# Altium PCB STM32F302VC_EVM.PcbDoc (part 6 of 19)
Units mil, origin at the board's own origin, x right, y up, seen from the top; angles counter-clockwise.
Board outline 3937.01 x 3937.01 mil, 2 copper layers (Top Layer, Bottom Layer); 117 components, 166 nets, 602 pads, 373 vias.
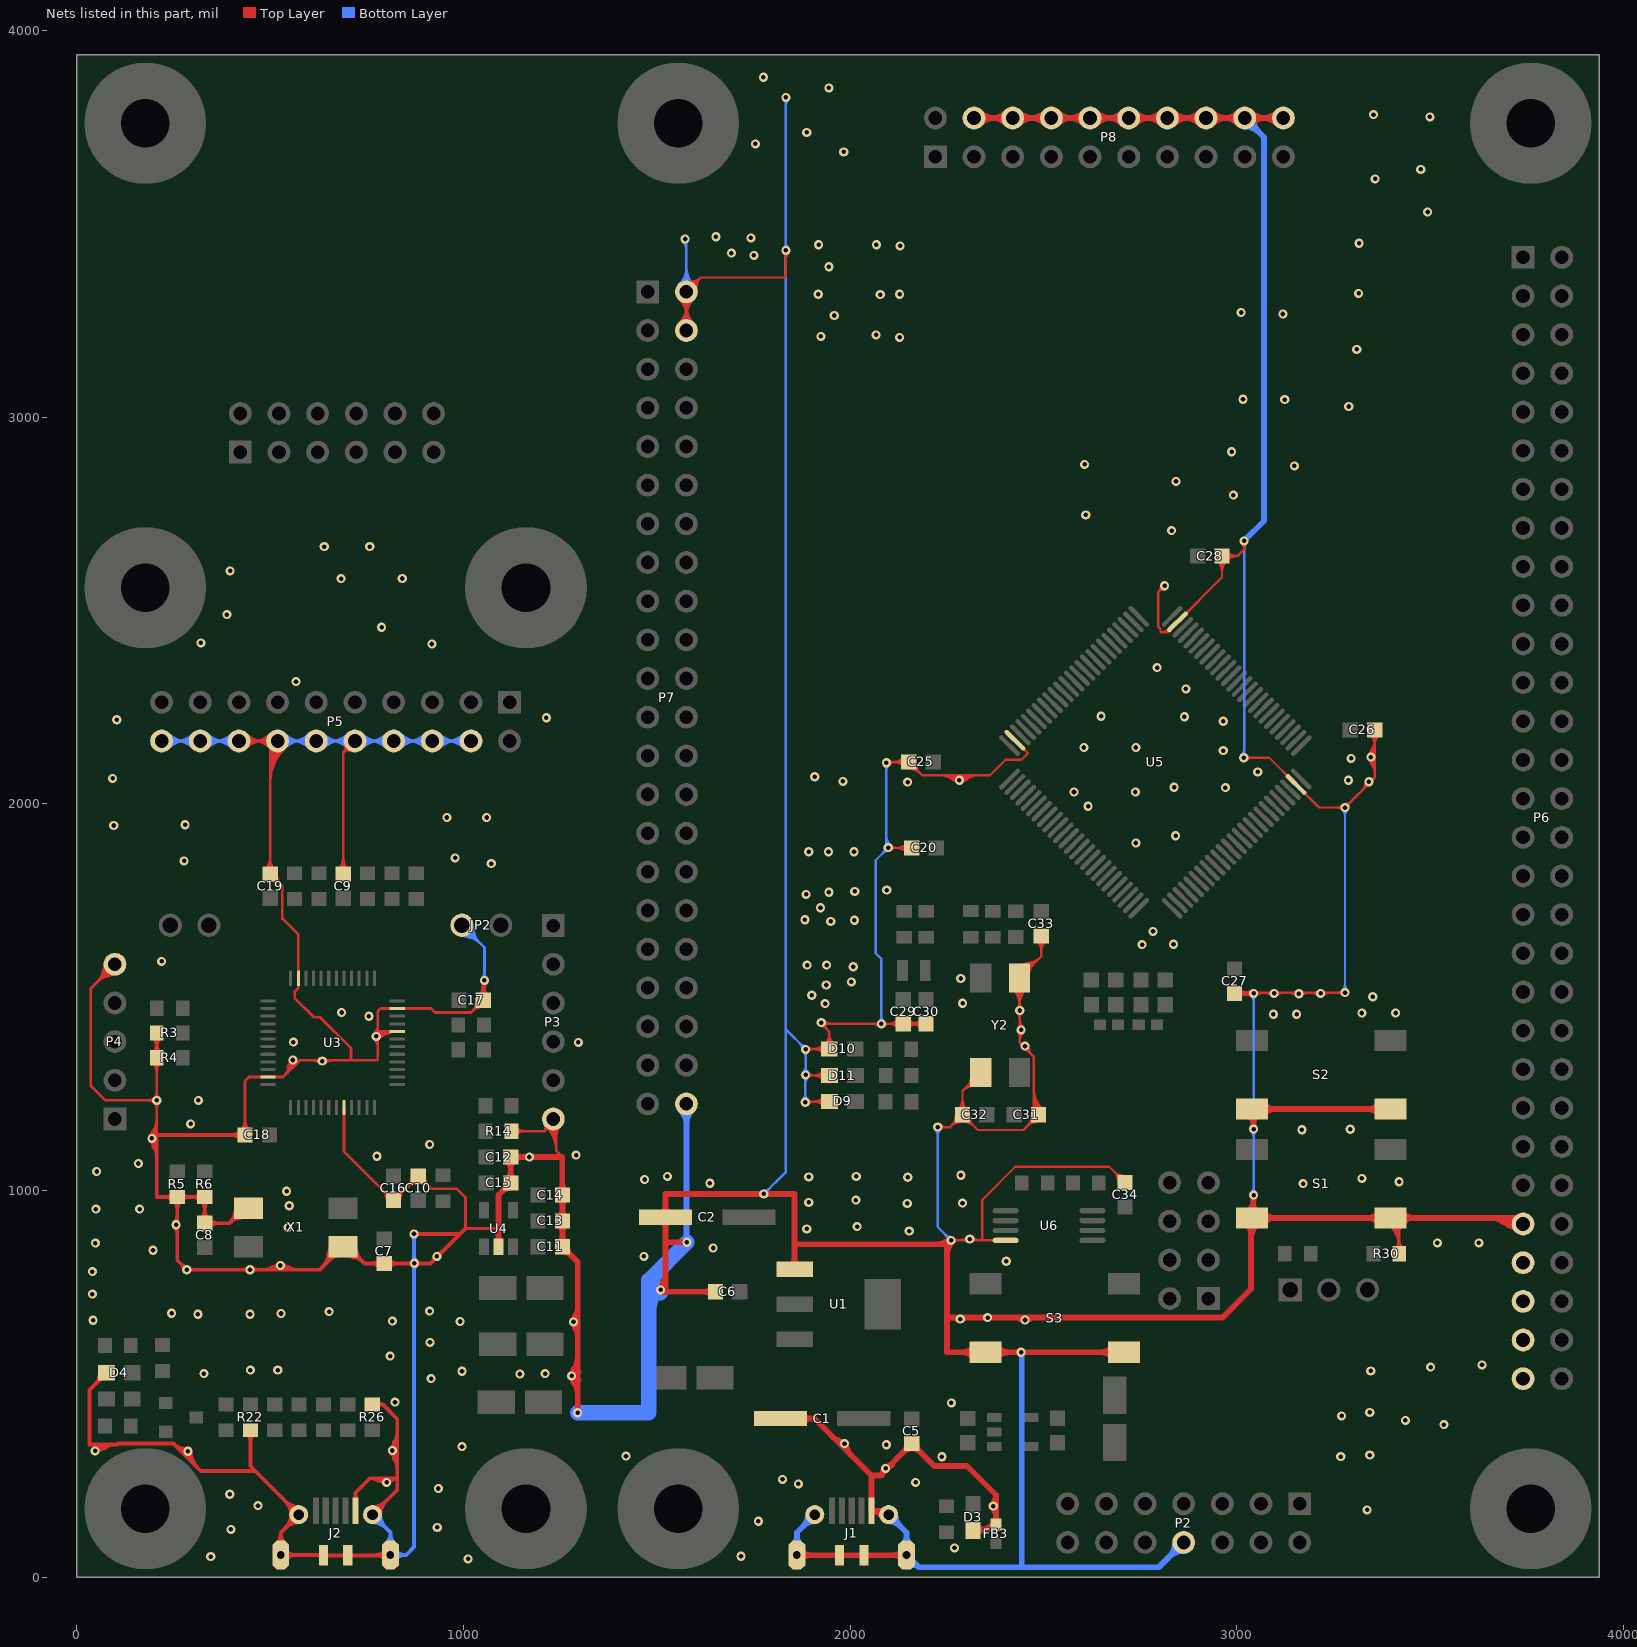
[diagram p6: the nets of this part, all layers, seen from the top]

## Via types
v1: diameter 23.62, hole 11.81, Top Layer to Bottom Layer, tented both sides, 372 vias
v2: diameter 50, hole 28, Top Layer to Bottom Layer, tented both sides, 1 vias

## Nets (pads, with @x,y where several pads share a name; then routed paths per layer and width w, separated by ;. In a path a pad name is that pad's centre, name@x,y a point inside that pad or via, vN(x,y) a via of type N, cw(c..) or ccw(c..) an arc to the next point about the centre after c; other vN are vias at no path point) (continued)
GND: (continued)
  Top Layer w10: v1@48.24,333.5 ccw(c50.43,347.44) 62.65,340.38 ; v1@53.25,323.67 cw(c69.09,315.56) 69.09,333.35 ; D4.2@76.71,528.54 32.48,484.31 32.48,343.5 105.24,343.5 107.38,345.65 249.83,345.65 ; v1@190.49,1129.01 cw(c181.54,1114.2) 198.78,1112.78 ; R3.2@206.69,1407.48 206.69,1345.47 R4.1@208.66,1343.5 ; v1@293.88,323.7 ccw(c310.82,318.23) 298.24,305.65 ; C18.1@435.04,1143.7 208.66,1143.7 ; X1.4@443.9,954.53 433.49,954.53 394.32,915.35 C8.2@330.71,915.35 R6.1@330.71,983.27 R5.1@259.84,983.27 ; R22.1@448.82,379.92 448.82,286.91 J2.9@573.82,161.91 527.56,115.65 J2.7@527.56,57.58 636.81,57.58 J2.11@637.8,56.59 J2.10@700.79,56.59 810.04,56.59 J2.6@811.02,57.58 ; 460.38,274.85 320.62,274.85 249.83,345.65 ; J2.5@720.47,171.75 720.47,218.5 757.87,255.91 828.61,255.91 ; R26.2@763.78,446.85 791.34,446.85 ; J2.8@764.76,161.91 828.61,225.76 828.61,255.91 ; v1@812.48,321.89 cw(c803.91,307.36) 820.73,305.95 ; v1@812.48,333.62 ccw(c803.91,348.16) 820.73,349.56 ; v1(872.05,887.8) 989.17,887.8 ; 1004.92,901.57 914.37,811.02 C7.2@795.28,811.02 744.09,811.02 700.59,854.53 X1.2@687.99,854.53 628.74,795.28 v1(284.32,795.28) 259.84,819.76 R5.1@259.84,983.27 ; v1@44.93,329.03 cw(c79.89,294.08) 79.89,343.5 ; v1@44.93,329.03 cw(c79.89,294.08) 79.89,343.5 ; v1@44.93,329.03 cw(c79.89,294.08) 79.89,343.5 ; 48.28,500.11 ccw(c19.85,528.54) D4.2@60.06,528.54 ; 48.28,500.11 ccw(c19.85,528.54) D4.2@60.06,528.54 ; 48.28,500.11 ccw(c19.85,528.54) D4.2@60.06,528.54 ; v1@48.95,333.35 ccw(c59.02,370.93) 78.47,337.24 ; v1@48.95,333.35 ccw(c59.02,370.93) 78.47,337.24 ; v1@48.95,333.35 ccw(c59.02,370.93) 78.47,337.24 ; v1@52.01,321.96 cw(c104.03,269.93) 104.03,343.5 ; v1@52.01,321.96 cw(c104.03,269.93) 104.03,343.5 ; v1@52.01,321.96 cw(c104.03,269.93) 104.03,343.5 ; 53.03,504.87 cw(c74.74,483.16) D4.2@74.74,513.86 ; 53.03,504.87 cw(c74.74,483.16) D4.2@74.74,513.86 ; 53.03,504.87 cw(c74.74,483.16) D4.2@74.74,513.86 ; v1@53.77,325.01 cw(c79.81,318.03) 66.33,341.38 ; v1@53.77,325.01 cw(c79.81,318.03) 66.33,341.38 ; v1@53.77,325.01 cw(c79.81,318.03) 66.33,341.38 ; D4.2@57.13,517.62 cw(c78.98,511.77) D4.2@73.44,533.7 ; D4.2@57.13,517.62 cw(c78.98,511.77) D4.2@73.44,533.7 ; D4.2@57.13,517.62 cw(c78.98,511.77) D4.2@73.44,533.7 ; v1@189.19,1130.03 cw(c146.95,1087.78) 206.69,1087.78 ; v1@189.19,1130.03 cw(c146.95,1087.78) 206.69,1087.78 ; v1@189.19,1130.03 cw(c146.95,1087.78) 206.69,1087.78 ; v1@193.31,1128.07 cw(c191.54,1111.04) 206.37,1119.6 ; v1@193.31,1128.07 cw(c191.54,1111.04) 206.37,1119.6 ; v1@193.31,1128.07 cw(c191.54,1111.04) 206.37,1119.6 ; v1@196.27,1137.1 cw(c171.09,1111.92) 206.69,1111.92 ; v1@196.27,1137.1 cw(c171.09,1111.92) 206.69,1111.92 ; v1@196.27,1137.1 cw(c171.09,1111.92) 206.69,1111.92 ; v1@196.51,1141.18 ccw(c200.66,1151.7) 208.66,1143.7 ; v1@196.51,1141.18 ccw(c200.66,1151.7) 208.66,1143.7 ; v1@196.51,1141.18 ccw(c200.66,1151.7) 208.66,1143.7 ; v1@197.57,1140.65 ccw(c201.44,1146.98) 206.69,1141.73 ; v1@197.57,1140.65 ccw(c201.44,1146.98) 206.69,1141.73 ; v1@197.57,1140.65 ccw(c201.44,1146.98) 206.69,1141.73 ; R4.1@197.7,1354.46 ccw(c175.99,1376.17) 206.69,1376.17 ; R4.1@197.7,1354.46 ccw(c175.99,1376.17) 206.69,1376.17 ; R4.1@197.7,1354.46 ccw(c175.99,1376.17) 206.69,1376.17 ; R3.2@197.7,1396.52 cw(c175.99,1374.81) 206.69,1374.81 ; R3.2@197.7,1396.52 cw(c175.99,1374.81) 206.69,1374.81 ; R3.2@197.7,1396.52 cw(c175.99,1374.81) 206.69,1374.81 ; v1@200.42,1132.54 ccw(c229.64,1122.06) 202.76,1106.53 ; v1@200.42,1132.54 ccw(c229.64,1122.06) 202.76,1106.53 ; v1@200.42,1132.54 ccw(c229.64,1122.06) 202.76,1106.53 ; 206.69,1141.73 206.69,983.27 R5.1@259.84,983.27 ; 206.69,1141.73 208.66,1143.7 ; 206.69,1374.81 cw(c237.39,1374.81) R3.2@215.68,1396.52 ; 206.69,1374.81 cw(c237.39,1374.81) R3.2@215.68,1396.52 ; 206.69,1374.81 cw(c237.39,1374.81) R3.2@215.68,1396.52 ; 206.69,1376.17 ccw(c237.39,1376.17) R4.1@215.68,1354.46 ; 206.69,1376.17 ccw(c237.39,1376.17) R4.1@215.68,1354.46 ; 206.69,1376.17 ccw(c237.39,1376.17) R4.1@215.68,1354.46 ; 227.17,983.27 cw(c227.17,952.57) R5.1@248.88,974.28 ; 227.17,983.27 ccw(c227.17,1013.97) R5.1@248.88,992.26 ; 227.17,983.27 ccw(c227.17,1013.97) R5.1@248.88,992.26 ; 227.17,983.27 cw(c227.17,952.57) R5.1@248.88,974.28 ; 227.17,983.27 ccw(c227.17,1013.97) R5.1@248.88,992.26 ; 227.17,983.27 cw(c227.17,952.57) R5.1@248.88,974.28 ; 249.83,345.64 ccw(c282,377.82) v1@286.7,332.56 ; 249.83,345.64 ccw(c282,377.82) v1@286.7,332.56 ; 249.83,345.64 ccw(c282,377.82) v1@286.7,332.56 ; R5.1@250.85,974.28 cw(c229.14,952.57) 259.84,952.57 ; R5.1@250.85,974.28 cw(c229.14,952.57) 259.84,952.57 ; R5.1@250.85,974.28 cw(c229.14,952.57) 259.84,952.57 ; v1@252.07,906.6 cw(c233.32,887.85) 259.84,887.85 ; v1@252.07,906.6 cw(c233.32,887.85) 259.84,887.85 ; v1@252.07,906.6 cw(c233.32,887.85) 259.84,887.85 ; v1@252.07,916.23 ccw(c233.32,934.99) 259.84,934.99 ; v1@252.07,916.23 ccw(c233.32,934.99) 259.84,934.99 ; v1@252.07,916.23 ccw(c233.32,934.99) 259.84,934.99 ; 259.84,952.57 cw(c290.54,952.57) R5.1@268.83,974.28 ; 259.84,952.57 cw(c290.54,952.57) R5.1@268.83,974.28 ; 259.84,952.57 cw(c290.54,952.57) R5.1@268.83,974.28 ; 264.68,330.8 ccw(c284.79,350.91) v1@287.73,322.62 ; 264.68,330.8 ccw(c284.79,350.91) v1@287.73,322.62 ; 264.68,330.8 ccw(c284.79,350.91) v1@287.73,322.62 ; R5.1@270.8,974.28 cw(c292.51,952.57) 292.51,983.27 ; R5.1@270.8,974.28 cw(c292.51,952.57) 292.51,983.27 ; R5.1@270.8,974.28 cw(c292.51,952.57) 292.51,983.27 ; R5.1@270.8,992.26 ccw(c292.51,1013.97) 292.51,983.27 ; R5.1@270.8,992.26 ccw(c292.51,1013.97) 292.51,983.27 ; R5.1@270.8,992.26 ccw(c292.51,1013.97) 292.51,983.27 ; 272.7,806.9 cw(c261.07,795.28) v1@277.51,795.28 ; 272.7,806.9 ccw(c284.32,818.53) v1@284.32,802.09 ; 272.7,806.9 ccw(c284.32,818.53) v1@284.32,802.09 ; 272.7,806.9 cw(c261.07,795.28) v1@277.51,795.28 ; 272.7,806.9 ccw(c284.32,818.53) v1@284.32,802.09 ; 272.7,806.9 cw(c261.07,795.28) v1@277.51,795.28 ; v1@284,319.89 cw(c264.54,286.2) 302.12,296.27 ; v1@284,319.89 cw(c264.54,286.2) 302.12,296.27 ; v1@284,319.89 cw(c264.54,286.2) 302.12,296.27 ; v1@284.21,325.79 ccw(c319.28,325.79) 294.48,300.99 ; v1@284.21,325.79 ccw(c319.28,325.79) 294.48,300.99 ; v1@284.21,325.79 ccw(c319.28,325.79) 294.48,300.99 ; 287.53,313.4 cw(c292.75,314.8) v1@290.38,319.66 ; 287.53,313.4 cw(c292.75,314.8) v1@290.38,319.66 ; 287.53,313.4 cw(c292.75,314.8) v1@290.38,319.66 ; v1@289.14,790.46 cw(c300.77,778.83) 300.77,795.28 ; v1@289.14,790.46 cw(c300.77,778.83) 300.77,795.28 ; v1@289.14,790.46 cw(c300.77,778.83) 300.77,795.28 ; v1@289.14,800.09 ccw(c300.77,811.72) 300.77,795.28 ; v1@289.14,800.09 ccw(c300.77,811.72) 300.77,795.28 ; v1@289.14,800.09 ccw(c300.77,811.72) 300.77,795.28 ; v1@294.21,325.79 ccw(c353.43,325.79) 311.56,283.92 ; v1@294.21,325.79 ccw(c353.43,325.79) 311.56,283.92 ; v1@294.21,325.79 ccw(c353.43,325.79) 311.56,283.92 ; 298.04,983.27 cw(c298.04,952.57) R6.1@319.75,974.28 ; 298.04,983.27 ccw(c298.04,1013.97) R6.1@319.75,992.26 ; 298.04,983.27 ccw(c298.04,1013.97) R6.1@319.75,992.26 ; 298.04,983.27 cw(c298.04,952.57) R6.1@319.75,974.28 ; 298.04,983.27 ccw(c298.04,1013.97) R6.1@319.75,992.26 ; 298.04,983.27 cw(c298.04,952.57) R6.1@319.75,974.28 ; C8.2@320.32,925.74 ccw(c295.26,950.81) 330.71,950.81 ; C8.2@320.32,925.74 ccw(c295.26,950.81) 330.71,950.81 ; C8.2@320.32,925.74 ccw(c295.26,950.81) 330.71,950.81 ; R6.1@321.72,974.28 cw(c300.01,952.57) 330.71,952.57 ; R6.1@321.72,974.28 cw(c300.01,952.57) 330.71,952.57 ; R6.1@321.72,974.28 cw(c300.01,952.57) 330.71,952.57 ; 330.71,950.81 ccw(c366.16,950.81) C8.2@341.09,925.74 ; 330.71,950.81 ccw(c366.16,950.81) C8.2@341.09,925.74 ; 330.71,950.81 ccw(c366.16,950.81) C8.2@341.09,925.74 ; 330.71,952.57 cw(c361.41,952.57) R6.1@339.7,974.28 ; 330.71,952.57 cw(c361.41,952.57) R6.1@339.7,974.28 ; 330.71,952.57 cw(c361.41,952.57) R6.1@339.7,974.28 ; C8.2@341.09,904.97 cw(c366.16,879.9) 366.16,915.35 ; C8.2@341.09,904.97 cw(c366.16,879.9) 366.16,915.35 ; C8.2@341.09,904.97 cw(c366.16,879.9) 366.16,915.35 ; C8.2@341.09,925.74 ccw(c366.16,950.81) 366.16,915.35 ; C8.2@341.09,925.74 ccw(c366.16,950.81) 366.16,915.35 ; C8.2@341.09,925.74 ccw(c366.16,950.81) 366.16,915.35 ; 394.59,915.62 cw(c434.06,876.15) X1.4@434.06,931.97 ; 394.59,915.62 cw(c434.06,876.15) X1.4@434.06,931.97 ; 394.59,915.62 cw(c434.06,876.15) X1.4@434.06,931.97 ; 395.94,916.98 ccw(c358.39,954.53) X1.4@411.5,954.53 ; 395.94,916.98 ccw(c358.39,954.53) X1.4@411.5,954.53 ; 395.94,916.98 ccw(c358.39,954.53) X1.4@411.5,954.53 ; 399.59,1143.7 cw(c399.59,1108.25) C18.1@424.66,1133.32 ; 399.59,1143.7 ccw(c399.59,1179.15) C18.1@424.66,1154.08 ; 399.59,1143.7 ccw(c399.59,1179.15) C18.1@424.66,1154.08 ; 399.59,1143.7 cw(c399.59,1108.25) C18.1@424.66,1133.32 ; 399.59,1143.7 ccw(c399.59,1179.15) C18.1@424.66,1154.08 ; 399.59,1143.7 cw(c399.59,1108.25) C18.1@424.66,1133.32 ; X1.4@407.06,937.96 cw(c438.97,929.41) X1.4@432.63,961.83 ; X1.4@407.06,937.96 cw(c438.97,929.41) X1.4@432.63,961.83 ; X1.4@407.06,937.96 cw(c438.97,929.41) X1.4@432.63,961.83 ; X1.4@411.66,932.69 cw(c434.06,910.29) X1.4@434.06,941.97 ; X1.4@411.66,932.69 cw(c434.06,910.29) X1.4@434.06,941.97 ; X1.4@411.66,932.69 cw(c434.06,910.29) X1.4@434.06,941.97 ; X1.4@413.01,934.05 ccw(c392.53,954.53) X1.4@421.5,954.53 ; X1.4@413.01,934.05 ccw(c392.53,954.53) X1.4@421.5,954.53 ; X1.4@413.01,934.05 ccw(c392.53,954.53) X1.4@421.5,954.53 ; X1.4@417.05,927.41 ccw(c408.3,960.03) X1.4@441.33,952.97 ; X1.4@417.05,927.41 ccw(c408.3,960.03) X1.4@441.33,952.97 ; X1.4@417.05,927.41 ccw(c408.3,960.03) X1.4@441.33,952.97 ; 431.39,795.28 cw(c431.39,778.83) v1@443.02,790.46 ; 431.39,795.28 ccw(c431.39,811.72) v1@443.02,800.09 ; 431.39,795.28 ccw(c431.39,811.72) v1@443.02,800.09 ; 431.39,795.28 cw(c431.39,778.83) v1@443.02,790.46 ; 431.39,795.28 ccw(c431.39,811.72) v1@443.02,800.09 ; 431.39,795.28 cw(c431.39,778.83) v1@443.02,790.46 ; R22.1@439.83,370.93 cw(c418.12,349.22) 448.82,349.22 ; R22.1@439.83,370.93 cw(c418.12,349.22) 448.82,349.22 ; R22.1@439.83,370.93 cw(c418.12,349.22) 448.82,349.22 ; 448.82,349.22 cw(c479.52,349.22) R22.1@457.81,370.93 ; 448.82,349.22 cw(c479.52,349.22) R22.1@457.81,370.93 ; 448.82,349.22 cw(c479.52,349.22) R22.1@457.81,370.93 ; v1@452.65,790.46 cw(c464.28,778.83) 464.28,795.28 ; v1@452.65,790.46 cw(c464.28,778.83) 464.28,795.28 ; v1@452.65,790.46 cw(c464.28,778.83) 464.28,795.28 ; v1@452.65,800.09 ccw(c464.28,811.72) 464.28,795.28 ; v1@452.65,800.09 ccw(c464.28,811.72) 464.28,795.28 ; v1@452.65,800.09 ccw(c464.28,811.72) 464.28,795.28 ; 483.99,795.28 ccw(c483.99,848.68) v1@521.76,810.92 ; 483.99,795.28 ccw(c483.99,848.68) v1@521.76,810.92 ; 483.99,795.28 ccw(c483.99,848.68) v1@521.76,810.92 ; 501.11,799 cw(c513.29,777.89) v1@523.67,799.94 ; 501.11,799 cw(c513.29,777.89) v1@523.67,799.94 ; 501.11,799 cw(c513.29,777.89) v1@523.67,799.94 ; 508.14,795.28 ccw(c508.14,824.54) v1@528.83,803.85 ; 508.14,795.28 ccw(c508.14,824.54) v1@528.83,803.85 ; 508.14,795.28 ccw(c508.14,824.54) v1@528.83,803.85 ; 514.17,795.38 ccw(c508.55,805.12) v1@519.77,805.73 ; 514.17,795.38 ccw(c508.55,805.12) v1@519.77,805.73 ; 514.17,795.38 ccw(c508.55,805.12) v1@519.77,805.73 ; J2.7@515.78,85.1 ccw(c487.35,113.53) 527.56,113.53 ; J2.7@515.78,85.1 ccw(c487.35,113.53) 527.56,113.53 ; J2.7@515.78,85.1 ccw(c487.35,113.53) 527.56,113.53 ; v1@524.32,803.85 ccw(c545.01,824.54) 545.01,795.28 ; v1@524.32,803.85 ccw(c545.01,824.54) 545.01,795.28 ; v1@524.32,803.85 ccw(c545.01,824.54) 545.01,795.28 ; 527.56,113.53 ccw(c567.76,113.53) J2.7@539.33,85.1 ; 527.56,113.53 ccw(c567.76,113.53) J2.7@539.33,85.1 ; 527.56,113.53 ccw(c567.76,113.53) J2.7@539.33,85.1 ; v1@529.48,799.94 cw(c539.86,777.89) 552.04,799 ; v1@529.48,799.94 cw(c539.86,777.89) 552.04,799 ; v1@529.48,799.94 cw(c539.86,777.89) 552.04,799 ; v1@531.39,810.92 ccw(c569.16,848.68) 569.16,795.28 ; v1@531.39,810.92 ccw(c569.16,848.68) 569.16,795.28 ; v1@531.39,810.92 ccw(c569.16,848.68) 569.16,795.28 ; v1@533.38,805.73 ccw(c544.6,805.12) 538.98,795.38 ; v1@533.38,805.73 ccw(c544.6,805.12) 538.98,795.38 ; v1@533.38,805.73 ccw(c544.6,805.12) 538.98,795.38 ; J2.7@539.33,45.8 cw(c567.76,17.37) 567.76,57.58 ; J2.7@539.33,45.8 cw(c567.76,17.37) 567.76,57.58 ; J2.7@539.33,45.8 cw(c567.76,17.37) 567.76,57.58 ; J2.7@539.33,69.35 ccw(c567.76,97.78) 567.76,57.58 ; J2.7@539.33,69.35 ccw(c567.76,97.78) 567.76,57.58 ; J2.7@539.33,69.35 ccw(c567.76,97.78) 567.76,57.58 ; 540.35,128.44 cw(c573.82,94.97) J2.9@573.82,142.3 ; 540.35,128.44 ccw(c506.88,161.91) J2.9@554.21,161.91 ; 540.35,128.44 ccw(c506.88,161.91) J2.9@554.21,161.91 ; 540.35,128.44 cw(c573.82,94.97) J2.9@573.82,142.3 ; 540.35,128.44 ccw(c506.88,161.91) J2.9@554.21,161.91 ; 540.35,128.44 cw(c573.82,94.97) J2.9@573.82,142.3 ; 540.35,195.38 cw(c506.88,161.91) J2.9@554.21,161.91 ; 540.35,195.38 ccw(c573.82,228.85) J2.9@573.82,181.52 ; 540.35,195.38 ccw(c573.82,228.85) J2.9@573.82,181.52 ; 540.35,195.38 cw(c506.88,161.91) J2.9@554.21,161.91 ; 540.35,195.38 ccw(c573.82,228.85) J2.9@573.82,181.52 ; 540.35,195.38 cw(c506.88,161.91) J2.9@554.21,161.91 ; 547.76,137.82 cw(c580.55,129.04) J2.9@573.74,162.3 ; 547.76,137.82 cw(c580.55,129.04) J2.9@573.74,162.3 ; 547.76,137.82 cw(c580.55,129.04) J2.9@573.74,162.3 ; 547.76,186 ccw(c580.55,194.78) J2.9@573.74,161.52 ; 547.76,186 ccw(c580.55,194.78) J2.9@573.74,161.52 ; 547.76,186 ccw(c580.55,194.78) J2.9@573.74,161.52 ; 549.73,135.85 ccw(c540.95,168.64) J2.9@574.2,161.83 ; 549.73,135.85 ccw(c540.95,168.64) J2.9@574.2,161.83 ; 549.73,135.85 ccw(c540.95,168.64) J2.9@574.2,161.83 ; 549.73,187.97 cw(c540.95,155.18) J2.9@574.2,161.99 ; 549.73,187.97 cw(c540.95,155.18) J2.9@574.2,161.99 ; 549.73,187.97 cw(c540.95,155.18) J2.9@574.2,161.99 ; 618.98,57.58 cw(c618.98,37.78) J2.11@632.98,51.78 ; 618.98,57.58 cw(c618.98,37.78) J2.11@632.98,51.78 ; 618.98,57.58 cw(c618.98,37.78) J2.11@632.98,51.78 ; 623.73,57.58 ccw(c623.73,70.66) J2.11@632.98,61.41 ; 623.73,57.58 ccw(c623.73,70.66) J2.11@632.98,61.41 ; 623.73,57.58 ccw(c623.73,70.66) J2.11@632.98,61.41 ; 632.68,799.21 ccw(c577.37,854.53) X1.2@655.59,854.53 ; 632.68,799.21 ccw(c577.37,854.53) X1.2@655.59,854.53 ; 632.68,799.21 ccw(c577.37,854.53) X1.2@655.59,854.53 ; J2.11@642.61,51.78 cw(c654.24,40.15) 654.24,56.59 ; J2.11@642.61,51.78 cw(c654.24,40.15) 654.24,56.59 ; J2.11@642.61,51.78 cw(c654.24,40.15) 654.24,56.59 ; J2.11@642.61,61.41 ccw(c654.24,73.04) 654.24,56.59 ; J2.11@642.61,61.41 ccw(c654.24,73.04) 654.24,56.59 ; J2.11@642.61,61.41 ccw(c654.24,73.04) 654.24,56.59 ; 645.16,815.58 cw(c696.7,801.77) X1.2@679,852.11 ; 645.16,815.58 cw(c696.7,801.77) X1.2@679,852.11 ; 645.16,815.58 cw(c696.7,801.77) X1.2@679,852.11 ; 649.75,816.29 ccw(c611.51,854.53) X1.2@665.59,854.53 ; 649.75,816.29 ccw(c611.51,854.53) X1.2@665.59,854.53 ; 649.75,816.29 ccw(c611.51,854.53) X1.2@665.59,854.53 ; 650.06,833.89 cw(c689.08,823.44) X1.2@675.68,861.55 ; 650.06,833.89 cw(c689.08,823.44) X1.2@675.68,861.55 ; 650.06,833.89 cw(c689.08,823.44) X1.2@675.68,861.55 ; 656.44,822.98 cw(c678.15,801.27) X1.2@678.15,831.97 ; 656.44,822.98 cw(c678.15,801.27) X1.2@678.15,831.97 ; 656.44,822.98 cw(c678.15,801.27) X1.2@678.15,831.97 ; 684.34,56.59 cw(c684.34,40.15) J2.10@695.97,51.78 ; 684.34,56.59 ccw(c684.34,73.04) J2.10@695.97,61.41 ; 684.34,56.59 ccw(c684.34,73.04) J2.10@695.97,61.41 ; 684.34,56.59 cw(c684.34,40.15) J2.10@695.97,51.78 ; 684.34,56.59 ccw(c684.34,73.04) J2.10@695.97,61.41 ; 684.34,56.59 cw(c684.34,40.15) J2.10@695.97,51.78 ; X1.2@690.61,852.73 ccw(c724.82,861.23) X1.2@715.7,827.18 ; X1.2@690.61,852.73 ccw(c724.82,861.23) X1.2@715.7,827.18 ; X1.2@690.61,852.73 ccw(c724.82,861.23) X1.2@715.7,827.18 ; X1.2@697.83,831.97 cw(c697.83,770.85) 741.05,814.07 ; X1.2@697.83,831.97 cw(c697.83,770.85) 741.05,814.07 ; X1.2@697.83,831.97 cw(c697.83,770.85) 741.05,814.07 ; X1.2@697.83,841.97 cw(c697.83,805) X1.2@723.98,831.14 ; X1.2@697.83,841.97 cw(c697.83,805) X1.2@723.98,831.14 ; X1.2@697.83,841.97 cw(c697.83,805) X1.2@723.98,831.14 ; X1.2@699,861.88 cw(c694.04,830.62) X1.2@724.6,838.81 ; X1.2@699,861.88 cw(c694.04,830.62) X1.2@724.6,838.81 ; X1.2@699,861.88 cw(c694.04,830.62) X1.2@724.6,838.81 ; X1.2@700.32,855.14 ccw(c743.63,865.9) 732.08,822.79 ; X1.2@700.32,855.14 ccw(c743.63,865.9) 732.08,822.79 ; X1.2@700.32,855.14 ccw(c743.63,865.9) 732.08,822.79 ; J2.10@705.6,51.78 cw(c717.23,40.15) 717.23,56.59 ; J2.10@705.6,51.78 cw(c717.23,40.15) 717.23,56.59 ; J2.10@705.6,51.78 cw(c717.23,40.15) 717.23,56.59 ; J2.10@705.6,61.41 ccw(c717.23,73.04) 717.23,56.59 ; J2.10@705.6,61.41 ccw(c717.23,73.04) 717.23,56.59 ; J2.10@705.6,61.41 ccw(c717.23,73.04) 717.23,56.59 ; X1.2@720.39,854.53 ccw(c768.2,854.53) 734.4,820.72 ; X1.2@720.39,854.53 ccw(c768.2,854.53) 734.4,820.72 ; X1.2@720.39,854.53 ccw(c768.2,854.53) 734.4,820.72 ; 758.6,255.91 cw(c758.6,202.5) v1@796.37,240.26 ; 758.6,255.91 cw(c758.6,202.5) v1@796.37,240.26 ; 758.6,255.91 cw(c758.6,202.5) v1@796.37,240.26 ; 759.82,811.02 cw(c759.82,775.57) C7.2@784.89,800.64 ; 759.82,811.02 ccw(c759.82,846.48) C7.2@784.89,821.41 ; 759.82,811.02 ccw(c759.82,846.48) C7.2@784.89,821.41 ; 759.82,811.02 cw(c759.82,775.57) C7.2@784.89,800.64 ; 759.82,811.02 ccw(c759.82,846.48) C7.2@784.89,821.41 ; 759.82,811.02 cw(c759.82,775.57) C7.2@784.89,800.64 ; J2.8@764.38,161.99 cw(c797.64,155.18) 788.85,187.97 ; J2.8@764.38,161.99 cw(c797.64,155.18) 788.85,187.97 ; J2.8@764.38,161.99 cw(c797.64,155.18) 788.85,187.97 ; J2.8@764.76,181.52 ccw(c764.76,228.85) 798.23,195.38 ; J2.8@764.76,181.52 ccw(c764.76,228.85) 798.23,195.38 ; J2.8@764.76,181.52 ccw(c764.76,228.85) 798.23,195.38 ; J2.8@764.84,161.52 ccw(c758.03,194.78) 790.82,186 ; J2.8@764.84,161.52 ccw(c758.03,194.78) 790.82,186 ; J2.8@764.84,161.52 ccw(c758.03,194.78) 790.82,186 ; 768.44,56.59 ccw(c768.44,100.16) J2.6@799.25,69.35 ; 768.44,56.59 ccw(c768.44,100.16) J2.6@799.25,69.35 ; 768.44,56.59 ccw(c768.44,100.16) J2.6@799.25,69.35 ; 773.19,56.59 cw(c773.19,19.75) J2.6@799.25,45.8 ; 773.19,56.59 cw(c773.19,19.75) J2.6@799.25,45.8 ; 773.19,56.59 cw(c773.19,19.75) J2.6@799.25,45.8 ; 775.71,252.19 ccw(c787.9,273.29) v1@798.28,251.24 ; 775.71,252.19 ccw(c787.9,273.29) v1@798.28,251.24 ; 775.71,252.19 ccw(c787.9,273.29) v1@798.28,251.24 ; R26.2@775.88,439.17 cw(c791.34,427.46) 791.34,446.85 ; R26.2@775.88,439.17 cw(c791.34,427.46) 791.34,446.85 ; R26.2@775.88,439.17 cw(c791.34,427.46) 791.34,446.85 ; R26.2@775.88,454.53 ccw(c791.34,466.24) 791.34,446.85 ; R26.2@775.88,454.53 ccw(c791.34,466.24) 791.34,446.85 ; R26.2@775.88,454.53 ccw(c791.34,466.24) 791.34,446.85 ; 782.74,255.91 cw(c782.74,226.64) v1@803.44,247.33 ; 782.74,255.91 cw(c782.74,226.64) v1@803.44,247.33 ; 782.74,255.91 cw(c782.74,226.64) v1@803.44,247.33 ; J2.8@784.37,161.91 cw(c831.7,161.91) 798.23,195.38 ; J2.8@784.37,161.91 cw(c831.7,161.91) 798.23,195.38 ; J2.8@784.37,161.91 cw(c831.7,161.91) 798.23,195.38 ; 788.78,255.8 cw(c783.16,246.06) v1@794.38,245.45 ; 788.78,255.8 cw(c783.16,246.06) v1@794.38,245.45 ; 788.78,255.8 cw(c783.16,246.06) v1@794.38,245.45 ; 791.34,446.85 828.61,409.57 828.61,255.91 ; v1@798.28,246.4 cw(c813.06,239.66) 813.06,255.91 ; v1@798.28,246.4 cw(c813.06,239.66) 813.06,255.91 ; v1@798.28,246.4 cw(c813.06,239.66) 813.06,255.91 ; v1@804.85,250.82 ccw(c809.38,257.91) 815.88,252.55 ; v1@804.85,250.82 ccw(c809.38,257.91) 815.88,252.55 ; v1@804.85,250.82 ccw(c809.38,257.91) 815.88,252.55 ; C7.2@805.66,800.64 cw(c830.73,775.57) 830.73,811.02 ; C7.2@805.66,800.64 cw(c830.73,775.57) 830.73,811.02 ; C7.2@805.66,800.64 cw(c830.73,775.57) 830.73,811.02 ; C7.2@805.66,821.41 ccw(c830.73,846.48) 830.73,811.02 ; C7.2@805.66,821.41 ccw(c830.73,846.48) 830.73,811.02 ; C7.2@805.66,821.41 ccw(c830.73,846.48) 830.73,811.02 ; v1@807.38,242.25 cw(c828.61,232.57) 828.61,255.91 ; v1@807.38,242.25 cw(c828.61,232.57) 828.61,255.91 ; v1@807.38,242.25 cw(c828.61,232.57) 828.61,255.91 ; v1@811.13,322.94 cw(c768.92,280.73) 828.61,280.73 ; v1@811.13,322.94 cw(c768.92,280.73) 828.61,280.73 ; v1@811.13,322.94 cw(c768.92,280.73) 828.61,280.73 ; v1@811.13,332.57 ccw(c768.92,374.79) 828.61,374.79 ; v1@811.13,332.57 ccw(c768.92,374.79) 828.61,374.79 ; v1@811.13,332.57 ccw(c768.92,374.79) 828.61,374.79 ; v1@815.25,320.98 cw(c813.5,303.99) 828.29,312.53 ; v1@815.25,320.98 cw(c813.5,303.99) 828.29,312.53 ; v1@815.25,320.98 cw(c813.5,303.99) 828.29,312.53 ; v1@815.25,334.53 ccw(c813.5,351.52) 828.29,342.98 ; v1@815.25,334.53 ccw(c813.5,351.52) 828.29,342.98 ; v1@815.25,334.53 ccw(c813.5,351.52) 828.29,342.98 ; v1@818.2,325.5 ccw(c793.06,350.64) 828.61,350.64 ; v1@818.2,325.5 ccw(c793.06,350.64) 828.61,350.64 ; v1@818.2,325.5 ccw(c793.06,350.64) 828.61,350.64 ; v1@818.2,330.01 cw(c793.06,304.87) 828.61,304.87 ; v1@818.2,330.01 cw(c793.06,304.87) 828.61,304.87 ; v1@818.2,330.01 cw(c793.06,304.87) 828.61,304.87 ; v1@822.35,325.45 ccw(c851.52,314.97) 824.68,299.47 ; v1@822.35,325.45 ccw(c851.52,314.97) 824.68,299.47 ; v1@822.35,325.45 ccw(c851.52,314.97) 824.68,299.47 ; v1@822.35,330.06 cw(c851.52,340.54) 824.68,356.04 ; v1@822.35,330.06 cw(c851.52,340.54) 824.68,356.04 ; v1@822.35,330.06 cw(c851.52,340.54) 824.68,356.04 ; 854.21,811.02 ccw(c854.21,830.83) v1@868.22,816.82 ; 854.21,811.02 ccw(c854.21,830.83) v1@868.22,816.82 ; 854.21,811.02 ccw(c854.21,830.83) v1@868.22,816.82 ; 858.96,811.02 cw(c858.96,797.94) v1@868.22,807.19 ; 858.96,811.02 cw(c858.96,797.94) v1@868.22,807.19 ; 858.96,811.02 cw(c858.96,797.94) v1@868.22,807.19 ; v1@876.86,882.98 cw(c888.49,871.35) 888.49,887.8 ; v1@876.86,882.98 cw(c888.49,871.35) 888.49,887.8 ; v1@876.86,882.98 cw(c888.49,871.35) 888.49,887.8 ; v1@876.86,892.61 ccw(c888.49,904.24) 888.49,887.8 ; v1@876.86,892.61 ccw(c888.49,904.24) 888.49,887.8 ; v1@876.86,892.61 ccw(c888.49,904.24) 888.49,887.8 ; v1@877.85,807.19 cw(c887.1,797.94) 887.1,811.02 ; v1@877.85,807.19 cw(c887.1,797.94) 887.1,811.02 ; v1@877.85,807.19 cw(c887.1,797.94) 887.1,811.02 ; v1@877.85,816.82 ccw(c891.85,830.83) 891.85,811.02 ; v1@877.85,816.82 ccw(c891.85,830.83) 891.85,811.02 ; v1@877.85,816.82 ccw(c891.85,830.83) 891.85,811.02 ; 918.08,814.74 ccw(c903.1,829.72) v1@924.29,829.72 ; 918.08,814.74 ccw(c903.1,829.72) v1@924.29,829.72 ; 918.08,814.74 ccw(c903.1,829.72) v1@924.29,829.72 ; 922.84,819.49 cw(c931.1,811.22) v1@931.1,822.91 ; 922.84,819.49 cw(c931.1,811.22) v1@931.1,822.91 ; 922.84,819.49 cw(c931.1,811.22) v1@931.1,822.91 ; v1@931.1,836.54 ccw(c931.1,857.73) 946.09,842.74 ; v1@931.1,836.54 ccw(c931.1,857.73) 946.09,842.74 ; v1@931.1,836.54 ccw(c931.1,857.73) 946.09,842.74 ; v1@937.91,829.72 cw(c949.6,829.72) 941.34,837.99 ; v1@937.91,829.72 cw(c949.6,829.72) 941.34,837.99 ; v1@937.91,829.72 cw(c949.6,829.72) 941.34,837.99
  Top Layer w15: U4.2@1090.55,854.33 1090.55,988.19 C15.1@1122.05,1019.68 C12.1@1122.05,1086.61 1255.61,1086.61 1255.61,988.49 C14.1@1255.91,988.19 C13.1@1255.91,921.26 C11.1@1255.91,854.33 1295.28,814.96 v1(1295.28,425.2) ; v1@1277.42,516.91 cw(c1271.41,506.2) 1283.69,506.2 ; v1@1277.56,524.51 ccw(c1272.43,534.53) 1283.69,534.53 ; v1@1282.34,656.67 cw(c1276.33,645.96) 1288.61,645.96 ; v1@1282.48,664.27 ccw(c1277.35,674.3) 1288.61,674.3 ; v1@1507.88,746.95 ccw(c1502.74,756.97) 1514.01,756.97 ; v1(1577.76,866.27) 1523.5,866.27 1522.65,867.13 ; C6.1@1651.57,738.19 1522.65,738.19 ; C1.2@1819.89,410.43 1907.48,410.43 2055.12,262.8 ; U1.1@1856.3,796.26 1856.3,991.14 v1(1776.57,991.14) 1522.65,991.14 C2.2@1522.65,931.1 1522.65,867.13 ; J1.7@1862.2,57.58 1863.19,56.59 J1.11@1972.44,56.59 J1.10@2035.43,56.59 J1.6@2144.68,56.59 ; 1863.64,860.94 2250.7,860.94 2250.7,673.23 ; 1972.49,352.43 ccw(c1980.45,360.39) v1@1983.91,349.68 ; v1@1989.34,344.25 ccw(c2000.06,340.79) 1992.09,332.83 ; 2085.04,270.3 ccw(c2079.26,276.93) v1@2087.5,279.99 ; v1@2093.04,285.54 ccw(c2096.11,293.77) 2102.73,288 ; J1.8@2099.41,161.91 2089.57,171.75 J1.5@2055.12,171.75 ; 2246.96,866.9 ccw(c2246.96,878.16) v1@2256.99,873.03 ; 2256.66,856.59 cw(c2268.95,856.59) v1@2262.94,867.3 ; P8.4@2320.28,3773.43 P8.6@2420.28,3773.43 P8.8@2520.28,3773.43 P8.10@2620.28,3773.43 P8.12@2720.28,3773.43 P8.14@2820.28,3773.43 P8.16@2920.28,3773.43 P8.18@3020.28,3773.43 P8.20@3120.28,3773.43 ; FB3.1@2376.97,135.83 2376.97,212.6 2302.17,287.4 2217.52,287.4 C5.1@2159.45,345.47 2076.77,262.8 2055.12,262.8 ; S3.1@2708.66,581.69 v1(2441.93,581.69) S3.2@2350.39,581.69 2250.7,581.69 2250.7,673.23 ; S2.2@3068.07,1210.63 S2.1@3426.34,1210.63 ; P6.51@3740.16,929.13 S1.1@3397.64,929.13 S1.2@3039.37,929.13 3036.42,929.13 3036.42,745.08 2962.6,671.26 2252.67,671.26 2250.7,673.23 ; 1101.25,998.88 cw(c1122.05,978.08) C15.1@1122.05,1007.5 ; 1101.25,998.88 ccw(c1080.45,1019.68) C15.1@1109.86,1019.68 ; 1101.25,998.88 ccw(c1080.45,1019.68) C15.1@1109.86,1019.68 ; 1101.25,998.88 cw(c1122.05,978.08) C15.1@1122.05,1007.5 ; 1101.25,998.88 ccw(c1080.45,1019.68) C15.1@1109.86,1019.68 ; 1101.25,998.88 cw(c1122.05,978.08) C15.1@1122.05,1007.5 ; C15.1@1113.43,1028.3 ccw(c1092.63,1049.1) 1122.05,1049.1 ; C15.1@1113.43,1028.3 ccw(c1092.63,1049.1) 1122.05,1049.1 ; C15.1@1113.43,1028.3 ccw(c1092.63,1049.1) 1122.05,1049.1 ; C12.1@1113.43,1078 cw(c1092.63,1057.2) 1122.05,1057.2 ; C12.1@1113.43,1078 cw(c1092.63,1057.2) 1122.05,1057.2 ; C12.1@1113.43,1078 cw(c1092.63,1057.2) 1122.05,1057.2 ; 1122.05,1049.1 ccw(c1151.46,1049.1) C15.1@1130.66,1028.3 ; 1122.05,1049.1 ccw(c1151.46,1049.1) C15.1@1130.66,1028.3 ; 1122.05,1049.1 ccw(c1151.46,1049.1) C15.1@1130.66,1028.3 ; 1122.05,1057.2 cw(c1151.46,1057.2) C12.1@1130.66,1078 ; 1122.05,1057.2 cw(c1151.46,1057.2) C12.1@1130.66,1078 ; 1122.05,1057.2 cw(c1151.46,1057.2) C12.1@1130.66,1078 ; C12.1@1130.66,1078 cw(c1151.46,1057.2) 1151.46,1086.61 ; C12.1@1130.66,1078 cw(c1151.46,1057.2) 1151.46,1086.61 ; C12.1@1130.66,1078 cw(c1151.46,1057.2) 1151.46,1086.61 ; C12.1@1130.66,1095.23 ccw(c1151.46,1116.03) 1151.46,1086.61 ; C12.1@1130.66,1095.23 ccw(c1151.46,1116.03) 1151.46,1086.61 ; C12.1@1130.66,1095.23 ccw(c1151.46,1116.03) 1151.46,1086.61 ; C11.1@1247.29,862.95 ccw(c1226.49,883.75) 1255.91,883.75 ; C11.1@1247.29,862.95 ccw(c1226.49,883.75) 1255.91,883.75 ; C11.1@1247.29,862.95 ccw(c1226.49,883.75) 1255.91,883.75 ; C13.1@1247.29,912.64 cw(c1226.49,891.84) 1255.91,891.84 ; C13.1@1247.29,912.64 cw(c1226.49,891.84) 1255.91,891.84 ; C13.1@1247.29,912.64 cw(c1226.49,891.84) 1255.91,891.84 ; C13.1@1247.29,929.88 ccw(c1226.49,950.68) 1255.91,950.68 ; C13.1@1247.29,929.88 ccw(c1226.49,950.68) 1255.91,950.68 ; C13.1@1247.29,929.88 ccw(c1226.49,950.68) 1255.91,950.68 ; C14.1@1247.29,979.57 cw(c1226.49,958.77) 1255.91,958.77 ; C14.1@1247.29,979.57 cw(c1226.49,958.77) 1255.91,958.77 ; C14.1@1247.29,979.57 cw(c1226.49,958.77) 1255.91,958.77 ; C14.1@1247.29,996.81 ccw(c1227.21,1016.89) 1255.61,1016.89 ; C14.1@1247.29,996.81 ccw(c1227.21,1016.89) 1255.61,1016.89 ; C14.1@1247.29,996.81 ccw(c1227.21,1016.89) 1255.61,1016.89 ; 1255.61,1018.33 ccw(c1286.04,1018.33) C14.1@1264.52,996.81 ; 1255.61,1018.33 ccw(c1286.04,1018.33) C14.1@1264.52,996.81 ; 1255.61,1018.33 ccw(c1286.04,1018.33) C14.1@1264.52,996.81 ; C11.1@1255.91,842.15 cw(c1255.91,812.73) 1276.71,833.53 ; C11.1@1255.91,842.15 cw(c1255.91,812.73) 1276.71,833.53 ; C11.1@1255.91,842.15 cw(c1255.91,812.73) 1276.71,833.53 ; 1255.91,883.75 ccw(c1285.32,883.75) C11.1@1264.52,862.95 ; 1255.91,883.75 ccw(c1285.32,883.75) C11.1@1264.52,862.95 ; 1255.91,883.75 ccw(c1285.32,883.75) C11.1@1264.52,862.95 ; 1255.91,891.84 cw(c1285.32,891.84) C13.1@1264.52,912.64 ; 1255.91,891.84 cw(c1285.32,891.84) C13.1@1264.52,912.64 ; 1255.91,891.84 cw(c1285.32,891.84) C13.1@1264.52,912.64 ; 1255.91,950.68 ccw(c1285.32,950.68) C13.1@1264.52,929.88 ; 1255.91,950.68 ccw(c1285.32,950.68) C13.1@1264.52,929.88 ; 1255.91,950.68 ccw(c1285.32,950.68) C13.1@1264.52,929.88 ; 1255.91,958.77 cw(c1285.32,958.77) C14.1@1264.52,979.57 ; 1255.91,958.77 cw(c1285.32,958.77) C14.1@1264.52,979.57 ; 1255.91,958.77 cw(c1285.32,958.77) C14.1@1264.52,979.57 ; C11.1@1268.09,854.33 ccw(c1297.51,854.33) 1276.71,833.53 ; C11.1@1268.09,854.33 ccw(c1297.51,854.33) 1276.71,833.53 ; C11.1@1268.09,854.33 ccw(c1297.51,854.33) 1276.71,833.53 ; v1@1276.48,517.62 cw(c1231.1,472.24) 1295.28,472.24 ; v1@1276.48,517.62 cw(c1231.1,472.24) 1295.28,472.24 ; v1@1276.48,517.62 cw(c1231.1,472.24) 1295.28,472.24 ; v1@1276.48,523.72 ccw(c1231.1,569.1) 1295.28,569.1 ; v1@1276.48,523.72 ccw(c1231.1,569.1) 1295.28,569.1 ; v1@1276.48,523.72 ccw(c1231.1,569.1) 1295.28,569.1 ; v1@1280.95,516.6 cw(c1285.46,503.7) 1297.3,510.53 ; v1@1280.95,516.6 cw(c1285.46,503.7) 1297.3,510.53 ; v1@1280.95,516.6 cw(c1285.46,503.7) 1297.3,510.53 ; v1@1280.95,524.74 ccw(c1285.46,537.64) 1297.3,530.81 ; v1@1280.95,524.74 ccw(c1285.46,537.64) 1297.3,530.81 ; v1@1280.95,524.74 ccw(c1285.46,537.64) 1297.3,530.81 ; v1@1281.4,657.38 cw(c1247.9,623.89) 1295.28,623.89 ; v1@1281.4,657.38 cw(c1247.9,623.89) 1295.28,623.89 ; v1@1281.4,657.38 cw(c1247.9,623.89) 1295.28,623.89 ; v1@1281.4,663.48 ccw(c1247.9,696.98) 1295.28,696.98 ; v1@1281.4,663.48 ccw(c1247.9,696.98) 1295.28,696.98 ; v1@1281.4,663.48 ccw(c1247.9,696.98) 1295.28,696.98 ; v1@1283.69,519.55 ccw(c1307.48,513.18) 1286.15,500.87 ; v1@1283.69,519.55 ccw(c1307.48,513.18) 1286.15,500.87 ; v1@1283.69,519.55 ccw(c1307.48,513.18) 1286.15,500.87 ; v1@1283.69,521.79 cw(c1307.48,528.16) 1286.15,540.47 ; v1@1283.69,521.79 cw(c1307.48,528.16) 1286.15,540.47 ; v1@1283.69,521.79 cw(c1307.48,528.16) 1286.15,540.47 ; v1@1287.09,513.11 ccw(c1267.31,532.88) 1295.28,532.88 ; v1@1287.09,513.11 ccw(c1267.31,532.88) 1295.28,532.88 ; v1@1287.09,513.11 ccw(c1267.31,532.88) 1295.28,532.88 ; v1@1287.09,528.23 cw(c1267.31,508.46) 1295.28,508.46 ; v1@1287.09,528.23 cw(c1267.31,508.46) 1295.28,508.46 ; v1@1287.09,528.23 cw(c1267.31,508.46) 1295.28,508.46 ; v1@1288.61,659.32 ccw(c1312.4,652.94) 1291.07,640.63 ; v1@1288.61,659.32 ccw(c1312.4,652.94) 1291.07,640.63 ; v1@1288.61,659.32 ccw(c1312.4,652.94) 1291.07,640.63 ; v1@1288.61,661.55 cw(c1312.4,667.92) 1291.07,680.23 ; v1@1288.61,661.55 cw(c1312.4,667.92) 1291.07,680.23 ; v1@1288.61,661.55 cw(c1312.4,667.92) 1291.07,680.23 ; v1@1506.79,746.16 ccw(c1468.53,784.43) 1522.65,784.43 ; v1@1506.79,746.16 ccw(c1468.53,784.43) 1522.65,784.43 ; v1@1506.79,746.16 ccw(c1468.53,784.43) 1522.65,784.43 ; v1@1512.44,739.67 cw(c1518.21,732.02) 1523.01,740.32 ; v1@1512.44,739.67 cw(c1518.21,732.02) 1523.01,740.32 ; v1@1512.44,739.67 cw(c1518.21,732.02) 1523.01,740.32 ; v1@1512.89,746.16 ccw(c1532.13,765.4) 1532.13,738.19 ; v1@1512.89,746.16 ccw(c1532.13,765.4) 1532.13,738.19 ; v1@1512.89,746.16 ccw(c1532.13,765.4) 1532.13,738.19 ; v1@1513.93,744.47 ccw(c1522.65,747.37) 1522.65,738.19 ; v1@1513.93,744.47 ccw(c1522.65,747.37) 1522.65,738.19 ; v1@1513.93,744.47 ccw(c1522.65,747.37) 1522.65,738.19 ; v1@1514.01,744.23 cw(c1537.79,750.6) 1516.47,762.91 ; v1@1514.01,744.23 cw(c1537.79,750.6) 1516.47,762.91 ; v1@1514.01,744.23 cw(c1537.79,750.6) 1516.47,762.91 ; C2.2@1514.03,922.49 cw(c1493.23,901.69) 1522.65,901.69 ; C2.2@1514.03,922.49 cw(c1493.23,901.69) 1522.65,901.69 ; C2.2@1514.03,922.49 cw(c1493.23,901.69) 1522.65,901.69 ; C2.2@1514.03,939.72 ccw(c1493.23,960.52) 1522.65,960.52 ; C2.2@1514.03,939.72 ccw(c1493.23,960.52) 1522.65,960.52 ; C2.2@1514.03,939.72 ccw(c1493.23,960.52) 1522.65,960.52 ; v1@1517.4,735.55 ccw(c1504.74,748.21) 1522.65,748.21 ; v1@1517.4,735.55 ccw(c1504.74,748.21) 1522.65,748.21 ; v1@1517.4,735.55 ccw(c1504.74,748.21) 1522.65,748.21 ; 1522.65,738.19 1522.65,867.13 ; 1522.65,901.69 cw(c1552.06,901.69) C2.2@1531.26,922.49 ; 1522.65,901.69 cw(c1552.06,901.69) C2.2@1531.26,922.49 ; 1522.65,901.69 cw(c1552.06,901.69) C2.2@1531.26,922.49 ; 1522.65,960.52 ccw(c1552.06,960.52) C2.2@1531.26,939.72 ; 1522.65,960.52 ccw(c1552.06,960.52) C2.2@1531.26,939.72 ; 1522.65,960.52 ccw(c1552.06,960.52) C2.2@1531.26,939.72 ; 1622.16,738.19 cw(c1622.16,708.77) C6.1@1642.96,729.57 ; 1622.16,738.19 ccw(c1622.16,767.61) C6.1@1642.96,746.81 ; 1622.16,738.19 ccw(c1622.16,767.61) C6.1@1642.96,746.81 ; 1622.16,738.19 cw(c1622.16,708.77) C6.1@1642.96,729.57 ; 1622.16,738.19 ccw(c1622.16,767.61) C6.1@1642.96,746.81 ; 1622.16,738.19 cw(c1622.16,708.77) C6.1@1642.96,729.57 ; U1.1@1847.68,804.88 ccw(c1826.88,825.68) 1856.3,825.68 ; U1.1@1847.68,804.88 ccw(c1826.88,825.68) 1856.3,825.68 ; U1.1@1847.68,804.88 ccw(c1826.88,825.68) 1856.3,825.68 ; 1856.3,825.68 ccw(c1885.72,825.68) U1.1@1864.92,804.88 ; 1856.3,825.68 ccw(c1885.72,825.68) U1.1@1864.92,804.88 ; 1856.3,825.68 ccw(c1885.72,825.68) U1.1@1864.92,804.88 ; J1.7@1872.21,47.57 cw(c1894,25.79) 1894,56.59 ; J1.7@1872.21,47.57 cw(c1894,25.79) 1894,56.59 ; J1.7@1872.21,47.57 cw(c1894,25.79) 1894,56.59 ; J1.7@1872.21,67.59 ccw(c1898.75,94.12) 1898.75,56.59 ; J1.7@1872.21,67.59 ccw(c1898.75,94.12) 1898.75,56.59 ; J1.7@1872.21,67.59 ccw(c1898.75,94.12) 1898.75,56.59 ; C1.2@1877.72,401.82 cw(c1898.52,381.02) 1898.52,410.43 ; C1.2@1877.72,401.82 cw(c1898.52,381.02) 1898.52,410.43 ; C1.2@1877.72,401.82 cw(c1898.52,381.02) 1898.52,410.43 ; C1.2@1877.72,419.05 ccw(c1898.52,439.85) 1898.52,410.43 ; C1.2@1877.72,419.05 ccw(c1898.52,439.85) 1898.52,410.43 ; C1.2@1877.72,419.05 ccw(c1898.52,439.85) 1898.52,410.43 ; 1955.86,362.05 ccw(c1985.24,391.43) v1@1985.24,349.88 ; 1955.86,362.05 ccw(c1985.24,391.43) v1@1985.24,349.88 ; 1955.86,362.05 ccw(c1985.24,391.43) v1@1985.24,349.88 ; 1966.55,354.89 cw(c1960.18,331.11) v1@1981.5,343.42 ; 1966.55,354.89 cw(c1960.18,331.11) v1@1981.5,343.42 ; 1966.55,354.89 cw(c1960.18,331.11) v1@1981.5,343.42 ; v1@1983.08,341.84 cw(c1970.77,320.51) 1994.55,326.89 ; v1@1983.08,341.84 cw(c1970.77,320.51) 1994.55,326.89 ; v1@1983.08,341.84 cw(c1970.77,320.51) 1994.55,326.89 ; v1@1989.55,345.57 ccw(c2031.09,345.57) 2001.71,316.2 ; v1@1989.55,345.57 ccw(c2031.09,345.57) 2001.71,316.2 ; v1@1989.55,345.57 ccw(c2031.09,345.57) 2001.71,316.2 ; J1.5@2055.12,171.75 cw(c2055.12,138.99) J1.8@2084.22,154.05 ; J1.5@2055.12,171.75 cw(c2055.12,138.99) J1.8@2084.22,154.05 ; J1.5@2055.12,171.75 cw(c2055.12,138.99) J1.8@2084.22,154.05 ; J1.5@2055.12,171.75 2055.12,262.8 ; 2081.39,267.42 ccw(c2067.31,281.5) v1@2087.22,281.5 ; 2081.39,267.42 ccw(c2067.31,281.5) v1@2087.22,281.5 ; 2081.39,267.42 ccw(c2067.31,281.5) v1@2087.22,281.5 ; 2082.69,264.57 cw(c2102.41,259.29) v1@2093.43,277.62 ; 2082.69,264.57 cw(c2102.41,259.29) v1@2093.43,277.62 ; 2082.69,264.57 cw(c2102.41,259.29) v1@2093.43,277.62 ; v1@2091.54,285.81 ccw(c2091.54,305.72) 2105.62,291.64 ; v1@2091.54,285.81 ccw(c2091.54,305.72) 2105.62,291.64 ; v1@2091.54,285.81 ccw(c2091.54,305.72) 2105.62,291.64 ; v1@2095.41,279.6 cw(c2113.74,270.62) 2108.46,290.34 ; v1@2095.41,279.6 cw(c2113.74,270.62) 2108.46,290.34 ; v1@2095.41,279.6 cw(c2113.74,270.62) 2108.46,290.34 ; 2109.12,56.59 ccw(c2109.12,94.12) J1.6@2135.66,67.59 ; 2109.12,56.59 ccw(c2109.12,94.12) J1.6@2135.66,67.59 ; 2109.12,56.59 ccw(c2109.12,94.12) J1.6@2135.66,67.59 ; 2113.88,56.59 cw(c2113.88,25.79) J1.6@2135.66,47.57 ; 2113.88,56.59 cw(c2113.88,25.79) J1.6@2135.66,47.57 ; 2113.88,56.59 cw(c2113.88,25.79) J1.6@2135.66,47.57 ; 2138.65,324.67 cw(c2159.45,303.87) C5.1@2159.45,333.29 ; 2138.65,324.67 ccw(c2117.85,345.47) C5.1@2147.26,345.47 ; 2138.65,324.67 ccw(c2117.85,345.47) C5.1@2147.26,345.47 ; 2138.65,324.67 cw(c2159.45,303.87) C5.1@2159.45,333.29 ; 2138.65,324.67 ccw(c2117.85,345.47) C5.1@2147.26,345.47 ; 2138.65,324.67 cw(c2159.45,303.87) C5.1@2159.45,333.29 ; C5.1@2159.45,333.29 cw(c2159.45,303.87) 2180.25,324.67 ; C5.1@2159.45,333.29 cw(c2159.45,303.87) 2180.25,324.67 ; C5.1@2159.45,333.29 cw(c2159.45,303.87) 2180.25,324.67 ; C5.1@2171.63,345.47 ccw(c2201.05,345.47) 2180.25,324.67 ; C5.1@2171.63,345.47 ccw(c2201.05,345.47) 2180.25,324.67 ; C5.1@2171.63,345.47 ccw(c2201.05,345.47) 2180.25,324.67 ; 2225.98,860.94 ccw(c2225.98,905.91) v1@2257.78,874.11 ; 2225.98,860.94 ccw(c2225.98,905.91) v1@2257.78,874.11 ; 2225.98,860.94 ccw(c2225.98,905.91) v1@2257.78,874.11 ; 2241.03,864.44 cw(c2253.34,843.11) v1@2259.71,866.9 ; 2241.03,864.44 cw(c2253.34,843.11) v1@2259.71,866.9 ; 2241.03,864.44 cw(c2253.34,843.11) v1@2259.71,866.9 ; 2250.7,836.22 cw(c2295.67,836.22) v1@2263.87,868.01 ; 2250.7,836.22 cw(c2295.67,836.22) v1@2263.87,868.01 ; 2250.7,836.22 cw(c2295.67,836.22) v1@2263.87,868.01 ; 2254.2,851.26 ccw(c2232.88,863.57) v1@2256.66,869.95 ; 2254.2,851.26 ccw(c2232.88,863.57) v1@2256.66,869.95 ; 2254.2,851.26 ccw(c2232.88,863.57) v1@2256.66,869.95 ; 2264.54,671.26 cw(c2264.54,647.41) v1@2281.4,664.27 ; 2264.54,671.26 cw(c2264.54,647.41) v1@2281.4,664.27 ; 2264.54,671.26 cw(c2264.54,647.41) v1@2281.4,664.27 ; v1@2287.5,664.27 cw(c2304.36,647.41) 2304.36,671.26 ; v1@2287.5,664.27 cw(c2304.36,647.41) 2304.36,671.26 ; v1@2287.5,664.27 cw(c2304.36,647.41) 2304.36,671.26 ; 2288.19,581.69 cw(c2288.19,533.27) S3.2@2322.43,567.51 ; 2288.19,581.69 ccw(c2288.19,630.12) S3.2@2322.43,595.88 ; 2288.19,581.69 ccw(c2288.19,630.12) S3.2@2322.43,595.88 ; 2288.19,581.69 cw(c2288.19,533.27) S3.2@2322.43,567.51 ; 2288.19,581.69 ccw(c2288.19,630.12) S3.2@2322.43,595.88 ; 2288.19,581.69 cw(c2288.19,533.27) S3.2@2322.43,567.51 ; P8.4@2335.85,3757.85 cw(c2373.45,3720.25) 2373.45,3773.43 ; P8.4@2335.85,3757.85 cw(c2373.45,3720.25) 2373.45,3773.43 ; P8.4@2335.85,3757.85 cw(c2373.45,3720.25) 2373.45,3773.43 ; P8.4@2335.85,3789 ccw(c2373.45,3826.6) 2373.45,3773.43 ; P8.4@2335.85,3789 ccw(c2373.45,3826.6) 2373.45,3773.43 ; P8.4@2335.85,3789 ccw(c2373.45,3826.6) 2373.45,3773.43 ; v1@2367.03,181.01 cw(c2343.04,157.01) 2376.97,157.01 ; v1@2367.03,181.01 cw(c2343.04,157.01) 2376.97,157.01 ; v1@2367.03,181.01 cw(c2343.04,157.01) 2376.97,157.01 ; v1@2367.03,187.1 ccw(c2343.04,211.1) 2376.97,211.1 ; v1@2367.03,187.1 ccw(c2343.04,211.1) 2376.97,211.1 ; v1@2367.03,187.1 ccw(c2343.04,211.1) 2376.97,211.1 ; 2367.1,3773.43 cw(c2367.1,3720.25) P8.6@2404.7,3757.85 ; 2367.1,3773.43 ccw(c2367.1,3826.6) P8.6@2404.7,3789 ; 2367.1,3773.43 ccw(c2367.1,3826.6) P8.6@2404.7,3789 ; 2367.1,3773.43 cw(c2367.1,3720.25) P8.6@2404.7,3757.85 ; 2367.1,3773.43 ccw(c2367.1,3826.6) P8.6@2404.7,3789 ; 2367.1,3773.43 cw(c2367.1,3720.25) P8.6@2404.7,3757.85 ; FB3.1@2372.53,142.24 ccw(c2361.81,152.96) 2376.97,152.96 ; FB3.1@2372.53,142.24 ccw(c2361.81,152.96) 2376.97,152.96 ; FB3.1@2372.53,142.24 ccw(c2361.81,152.96) 2376.97,152.96 ; v1@2373.99,182.23 ccw(c2388.08,175.66) 2374.61,167.88 ; v1@2373.99,182.23 ccw(c2388.08,175.66) 2374.61,167.88 ; v1@2373.99,182.23 ccw(c2388.08,175.66) 2374.61,167.88 ; v1@2373.99,185.88 cw(c2388.08,192.45) 2374.61,200.23 ; v1@2373.99,185.88 cw(c2388.08,192.45) 2374.61,200.23 ; v1@2373.99,185.88 cw(c2388.08,192.45) 2374.61,200.23 ; 2376.97,152.96 ccw(c2392.13,152.96) FB3.1@2381.41,142.24 ; 2376.97,152.96 ccw(c2392.13,152.96) FB3.1@2381.41,142.24 ; 2376.97,152.96 ccw(c2392.13,152.96) FB3.1@2381.41,142.24 ; S3.2@2378.36,567.51 cw(c2412.6,533.27) 2412.6,581.69 ; S3.2@2378.36,567.51 cw(c2412.6,533.27) 2412.6,581.69 ; S3.2@2378.36,567.51 cw(c2412.6,533.27) 2412.6,581.69 ; S3.2@2378.36,595.88 ccw(c2412.6,630.12) 2412.6,581.69 ; S3.2@2378.36,595.88 ccw(c2412.6,630.12) 2412.6,581.69 ; S3.2@2378.36,595.88 ccw(c2412.6,630.12) 2412.6,581.69 ; 2426.83,671.26 cw(c2426.83,639.94) v1@2448.98,662.09 ; 2426.83,671.26 cw(c2426.83,639.94) v1@2448.98,662.09 ; 2426.83,671.26 cw(c2426.83,639.94) v1@2448.98,662.09 ; P8.6@2435.85,3757.85 cw(c2473.45,3720.25) 2473.45,3773.43 ; P8.6@2435.85,3757.85 cw(c2473.45,3720.25) 2473.45,3773.43 ; P8.6@2435.85,3757.85 cw(c2473.45,3720.25) 2473.45,3773.43 ; P8.6@2435.85,3789 ccw(c2473.45,3826.6) 2473.45,3773.43 ; P8.6@2435.85,3789 ccw(c2473.45,3826.6) 2473.45,3773.43 ; P8.6@2435.85,3789 ccw(c2473.45,3826.6) 2473.45,3773.43 ; 2437.02,668.99 ccw(c2443.55,680.31) v1@2449.92,668.9 ; 2437.02,668.99 ccw(c2443.55,680.31) v1@2449.92,668.9 ; 2437.02,668.99 ccw(c2443.55,680.31) v1@2449.92,668.9 ; v1@2454.13,668.9 ccw(c2460.5,680.31) 2467.03,668.99 ; v1@2454.13,668.9 ccw(c2460.5,680.31) 2467.03,668.99 ; v1@2454.13,668.9 ccw(c2460.5,680.31) 2467.03,668.99 ; v1@2455.07,662.09 cw(c2477.22,639.94) 2477.22,671.26 ; v1@2455.07,662.09 cw(c2477.22,639.94) 2477.22,671.26 ; v1@2455.07,662.09 cw(c2477.22,639.94) 2477.22,671.26 ; 2467.1,3773.43 cw(c2467.1,3720.25) P8.8@2504.7,3757.85 ; 2467.1,3773.43 ccw(c2467.1,3826.6) P8.8@2504.7,3789 ; 2467.1,3773.43 ccw(c2467.1,3826.6) P8.8@2504.7,3789 ; 2467.1,3773.43 cw(c2467.1,3720.25) P8.8@2504.7,3757.85 ; 2467.1,3773.43 ccw(c2467.1,3826.6) P8.8@2504.7,3789 ; 2467.1,3773.43 cw(c2467.1,3720.25) P8.8@2504.7,3757.85 ; P8.8@2535.85,3757.85 cw(c2573.45,3720.25) 2573.45,3773.43 ; P8.8@2535.85,3757.85 cw(c2573.45,3720.25) 2573.45,3773.43 ; P8.8@2535.85,3757.85 cw(c2573.45,3720.25) 2573.45,3773.43 ; P8.8@2535.85,3789 ccw(c2573.45,3826.6) 2573.45,3773.43 ; P8.8@2535.85,3789 ccw(c2573.45,3826.6) 2573.45,3773.43 ; P8.8@2535.85,3789 ccw(c2573.45,3826.6) 2573.45,3773.43 ; 2567.1,3773.43 cw(c2567.1,3720.25) P8.10@2604.7,3757.85 ; 2567.1,3773.43 ccw(c2567.1,3826.6) P8.10@2604.7,3789 ; 2567.1,3773.43 ccw(c2567.1,3826.6) P8.10@2604.7,3789 ; 2567.1,3773.43 cw(c2567.1,3720.25) P8.10@2604.7,3757.85 ; 2567.1,3773.43 ccw(c2567.1,3826.6) P8.10@2604.7,3789 ; 2567.1,3773.43 cw(c2567.1,3720.25) P8.10@2604.7,3757.85 ; P8.10@2635.85,3757.85 cw(c2673.45,3720.25) 2673.45,3773.43 ; P8.10@2635.85,3757.85 cw(c2673.45,3720.25) 2673.45,3773.43 ; P8.10@2635.85,3757.85 cw(c2673.45,3720.25) 2673.45,3773.43 ; P8.10@2635.85,3789 ccw(c2673.45,3826.6) 2673.45,3773.43 ; P8.10@2635.85,3789 ccw(c2673.45,3826.6) 2673.45,3773.43 ; P8.10@2635.85,3789 ccw(c2673.45,3826.6) 2673.45,3773.43 ; 2646.46,581.69 cw(c2646.46,533.27) S3.1@2680.7,567.51 ; 2646.46,581.69 ccw(c2646.46,630.12) S3.1@2680.7,595.88 ; 2646.46,581.69 ccw(c2646.46,630.12) S3.1@2680.7,595.88 ; 2646.46,581.69 cw(c2646.46,533.27) S3.1@2680.7,567.51 ; 2646.46,581.69 ccw(c2646.46,630.12) S3.1@2680.7,595.88 ; 2646.46,581.69 cw(c2646.46,533.27) S3.1@2680.7,567.51 ; 2667.1,3773.43 cw(c2667.1,3720.25) P8.12@2704.7,3757.85 ; 2667.1,3773.43 ccw(c2667.1,3826.6) P8.12@2704.7,3789 ; 2667.1,3773.43 ccw(c2667.1,3826.6) P8.12@2704.7,3789 ; 2667.1,3773.43 cw(c2667.1,3720.25) P8.12@2704.7,3757.85 ; 2667.1,3773.43 ccw(c2667.1,3826.6) P8.12@2704.7,3789 ; 2667.1,3773.43 cw(c2667.1,3720.25) P8.12@2704.7,3757.85 ; P8.12@2735.85,3757.85 cw(c2773.45,3720.25) 2773.45,3773.43 ; P8.12@2735.85,3757.85 cw(c2773.45,3720.25) 2773.45,3773.43 ; P8.12@2735.85,3757.85 cw(c2773.45,3720.25) 2773.45,3773.43 ; P8.12@2735.85,3789 ccw(c2773.45,3826.6) 2773.45,3773.43 ; P8.12@2735.85,3789 ccw(c2773.45,3826.6) 2773.45,3773.43 ; P8.12@2735.85,3789 ccw(c2773.45,3826.6) 2773.45,3773.43 ; 2767.1,3773.43 cw(c2767.1,3720.25) P8.14@2804.7,3757.85 ; 2767.1,3773.43 ccw(c2767.1,3826.6) P8.14@2804.7,3789 ; 2767.1,3773.43 ccw(c2767.1,3826.6) P8.14@2804.7,3789 ; 2767.1,3773.43 cw(c2767.1,3720.25) P8.14@2804.7,3757.85 ; 2767.1,3773.43 ccw(c2767.1,3826.6) P8.14@2804.7,3789 ; 2767.1,3773.43 cw(c2767.1,3720.25) P8.14@2804.7,3757.85 ; P8.14@2835.85,3757.85 cw(c2873.45,3720.25) 2873.45,3773.43 ; P8.14@2835.85,3757.85 cw(c2873.45,3720.25) 2873.45,3773.43 ; P8.14@2835.85,3757.85 cw(c2873.45,3720.25) 2873.45,3773.43 ; P8.14@2835.85,3789 ccw(c2873.45,3826.6) 2873.45,3773.43 ; P8.14@2835.85,3789 ccw(c2873.45,3826.6) 2873.45,3773.43 ; P8.14@2835.85,3789 ccw(c2873.45,3826.6) 2873.45,3773.43 ; 2867.1,3773.43 cw(c2867.1,3720.25) P8.16@2904.7,3757.85 ; 2867.1,3773.43 ccw(c2867.1,3826.6) P8.16@2904.7,3789 ; 2867.1,3773.43 ccw(c2867.1,3826.6) P8.16@2904.7,3789 ; 2867.1,3773.43 cw(c2867.1,3720.25) P8.16@2904.7,3757.85 ; 2867.1,3773.43 ccw(c2867.1,3826.6) P8.16@2904.7,3789 ; 2867.1,3773.43 cw(c2867.1,3720.25) P8.16@2904.7,3757.85 ; P8.16@2935.85,3757.85 cw(c2973.45,3720.25) 2973.45,3773.43 ; P8.16@2935.85,3757.85 cw(c2973.45,3720.25) 2973.45,3773.43 ; P8.16@2935.85,3757.85 cw(c2973.45,3720.25) 2973.45,3773.43 ; P8.16@2935.85,3789 ccw(c2973.45,3826.6) 2973.45,3773.43 ; P8.16@2935.85,3789 ccw(c2973.45,3826.6) 2973.45,3773.43 ; P8.16@2935.85,3789 ccw(c2973.45,3826.6) 2973.45,3773.43 ; 2967.1,3773.43 cw(c2967.1,3720.25) P8.18@3004.7,3757.85 ; 2967.1,3773.43 ccw(c2967.1,3826.6) P8.18@3004.7,3789 ; 2967.1,3773.43 ccw(c2967.1,3826.6) P8.18@3004.7,3789 ; 2967.1,3773.43 cw(c2967.1,3720.25) P8.18@3004.7,3757.85 ; 2967.1,3773.43 ccw(c2967.1,3826.6) P8.18@3004.7,3789 ; 2967.1,3773.43 cw(c2967.1,3720.25) P8.18@3004.7,3757.85 ; S1.2@3025.19,914.95 cw(c2998.07,887.84) 3036.42,887.84 ; S1.2@3025.19,914.95 cw(c2998.07,887.84) 3036.42,887.84 ; S1.2@3025.19,914.95 cw(c2998.07,887.84) 3036.42,887.84 ; P8.18@3035.85,3757.85 cw(c3073.45,3720.25) 3073.45,3773.43 ; P8.18@3035.85,3757.85 cw(c3073.45,3720.25) 3073.45,3773.43 ; P8.18@3035.85,3757.85 cw(c3073.45,3720.25) 3073.45,3773.43 ; P8.18@3035.85,3789 ccw(c3073.45,3826.6) 3073.45,3773.43 ; P8.18@3035.85,3789 ccw(c3073.45,3826.6) 3073.45,3773.43 ; P8.18@3035.85,3789 ccw(c3073.45,3826.6) 3073.45,3773.43 ; 3036.42,873.58 cw(c3094.93,873.58) S1.2@3053.55,914.95 ; 3036.42,873.58 cw(c3094.93,873.58) S1.2@3053.55,914.95 ; 3036.42,873.58 cw(c3094.93,873.58) S1.2@3053.55,914.95 ; 3067.1,3773.43 cw(c3067.1,3720.25) P8.20@3104.7,3757.85 ; 3067.1,3773.43 ccw(c3067.1,3826.6) P8.20@3104.7,3789 ; 3067.1,3773.43 ccw(c3067.1,3826.6) P8.20@3104.7,3789 ; 3067.1,3773.43 cw(c3067.1,3720.25) P8.20@3104.7,3757.85 ; 3067.1,3773.43 ccw(c3067.1,3826.6) P8.20@3104.7,3789 ; 3067.1,3773.43 cw(c3067.1,3720.25) P8.20@3104.7,3757.85 ; S1.2@3067.33,914.95 cw(c3101.58,880.71) 3101.58,929.13 ; S1.2@3067.33,914.95 cw(c3101.58,880.71) 3101.58,929.13 ; S1.2@3067.33,914.95 cw(c3101.58,880.71) 3101.58,929.13 ; S1.2@3067.33,943.32 ccw(c3101.58,977.56) 3101.58,929.13 ; S1.2@3067.33,943.32 ccw(c3101.58,977.56) 3101.58,929.13 ; S1.2@3067.33,943.32 ccw(c3101.58,977.56) 3101.58,929.13 ; S2.2@3067.33,1196.45 cw(c3101.58,1162.2) 3101.58,1210.63 ; S2.2@3067.33,1196.45 cw(c3101.58,1162.2) 3101.58,1210.63 ; S2.2@3067.33,1196.45 cw(c3101.58,1162.2) 3101.58,1210.63 ; S2.2@3067.33,1224.81 ccw(c3101.58,1259.06) 3101.58,1210.63 ; S2.2@3067.33,1224.81 ccw(c3101.58,1259.06) 3101.58,1210.63 ; S2.2@3067.33,1224.81 ccw(c3101.58,1259.06) 3101.58,1210.63 ; 3335.43,929.13 cw(c3335.43,880.71) S1.1@3369.67,914.95 ; 3335.43,929.13 ccw(c3335.43,977.56) S1.1@3369.67,943.32 ; 3335.43,929.13 ccw(c3335.43,977.56) S1.1@3369.67,943.32 ; 3335.43,929.13 cw(c3335.43,880.71) S1.1@3369.67,914.95 ; 3335.43,929.13 ccw(c3335.43,977.56) S1.1@3369.67,943.32 ; 3335.43,929.13 cw(c3335.43,880.71) S1.1@3369.67,914.95 ; 3335.43,1210.63 cw(c3335.43,1162.2) S2.1@3369.67,1196.45 ; 3335.43,1210.63 ccw(c3335.43,1259.06) S2.1@3369.67,1224.81 ; 3335.43,1210.63 ccw(c3335.43,1259.06) S2.1@3369.67,1224.81 ; 3335.43,1210.63 cw(c3335.43,1162.2) S2.1@3369.67,1196.45 ; 3335.43,1210.63 ccw(c3335.43,1259.06) S2.1@3369.67,1224.81 ; 3335.43,1210.63 cw(c3335.43,1162.2) S2.1@3369.67,1196.45 ; S1.1@3425.6,914.95 cw(c3459.84,880.71) 3459.84,929.13 ; S1.1@3425.6,914.95 cw(c3459.84,880.71) 3459.84,929.13 ; S1.1@3425.6,914.95 cw(c3459.84,880.71) 3459.84,929.13 ; S1.1@3425.6,943.32 ccw(c3459.84,977.56) 3459.84,929.13 ; S1.1@3425.6,943.32 ccw(c3459.84,977.56) 3459.84,929.13 ; S1.1@3425.6,943.32 ccw(c3459.84,977.56) 3459.84,929.13 ; 3648.96,929.13 cw(c3648.96,822.19) P6.51@3724.58,897.81 ; 3648.96,929.13 cw(c3648.96,822.19) P6.51@3724.58,897.81 ; 3648.96,929.13 cw(c3648.96,822.19) P6.51@3724.58,897.81 ; 3685.17,929.13 cw(c3685.17,858.4) P6.51@3735.19,908.42 ; 3685.17,929.13 cw(c3685.17,858.4) P6.51@3735.19,908.42 ; 3685.17,929.13 cw(c3685.17,858.4) P6.51@3735.19,908.42 ; 3687.28,919.35 ccw(c3700.83,942.81) P6.51@3722.52,926.58 ; 3687.28,919.35 ccw(c3700.83,942.81) P6.51@3722.52,926.58 ; 3687.28,919.35 ccw(c3700.83,942.81) P6.51@3722.52,926.58 ; 3701.91,910.9 ccw(c3714.45,932.62) P6.51@3734.53,917.6 ; 3701.91,910.9 ccw(c3714.45,932.62) P6.51@3734.53,917.6 ; 3701.91,910.9 ccw(c3714.45,932.62) P6.51@3734.53,917.6 ; 3706.87,924.76 ccw(c3713.4,936.06) P6.51@3723.35,927.63 ; 3706.87,924.76 ccw(c3713.4,936.06) P6.51@3723.35,927.63 ; 3706.87,924.76 ccw(c3713.4,936.06) P6.51@3723.35,927.63 ; 3706.88,924.76 cw(c3694.54,903.4) P6.51@3718.64,908.67 ; 3706.88,924.76 cw(c3694.54,903.4) P6.51@3718.64,908.67 ; 3706.88,924.76 cw(c3694.54,903.4) P6.51@3718.64,908.67